# Altium PCB LM2596Adj_pcb.PcbDoc
Units mil, origin at the board's own origin, x right, y up, seen from the top; angles counter-clockwise.
Board outline 2650.03 x 2120.03 mil, 2 copper layers (Top Layer, Bottom Layer); 11 components, 6 nets, 29 pads, 0 vias.
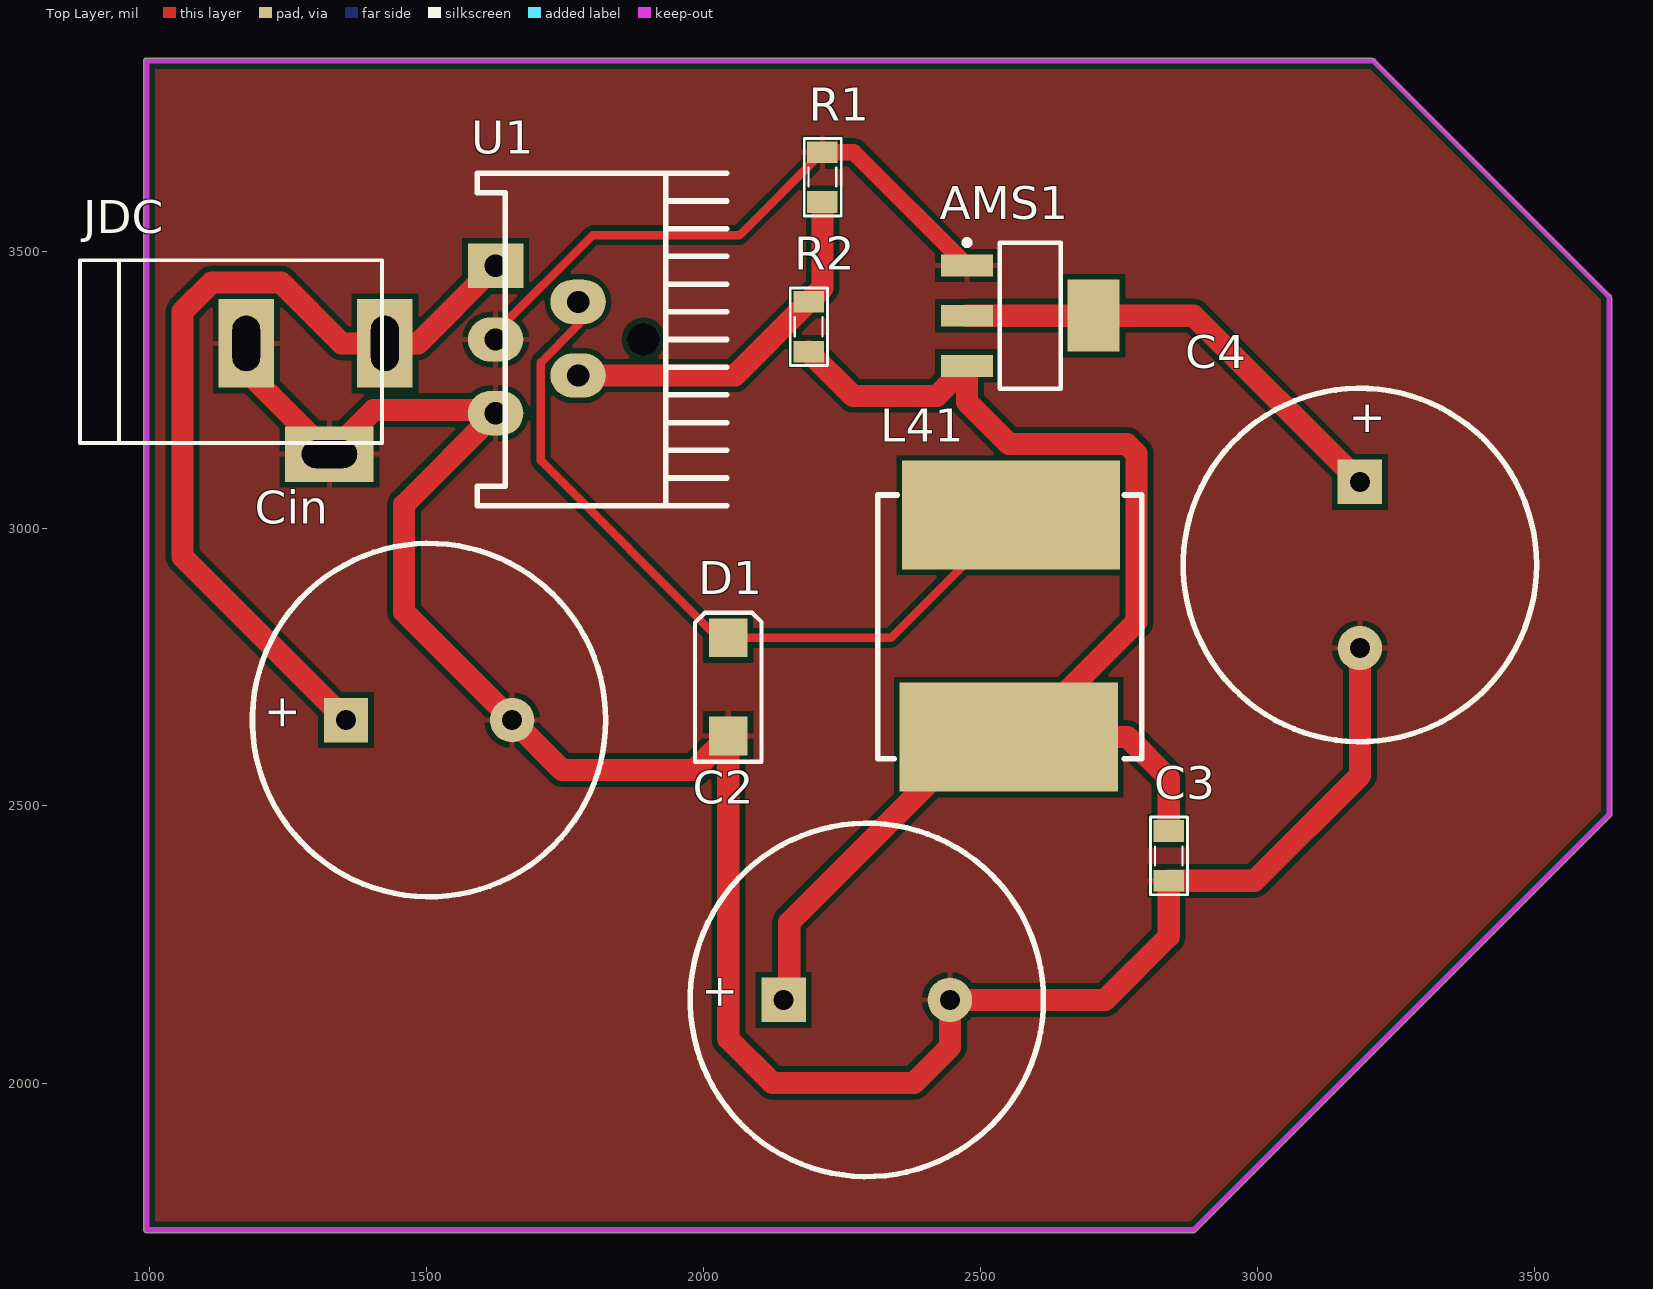
[diagram p0: Top Layer view]
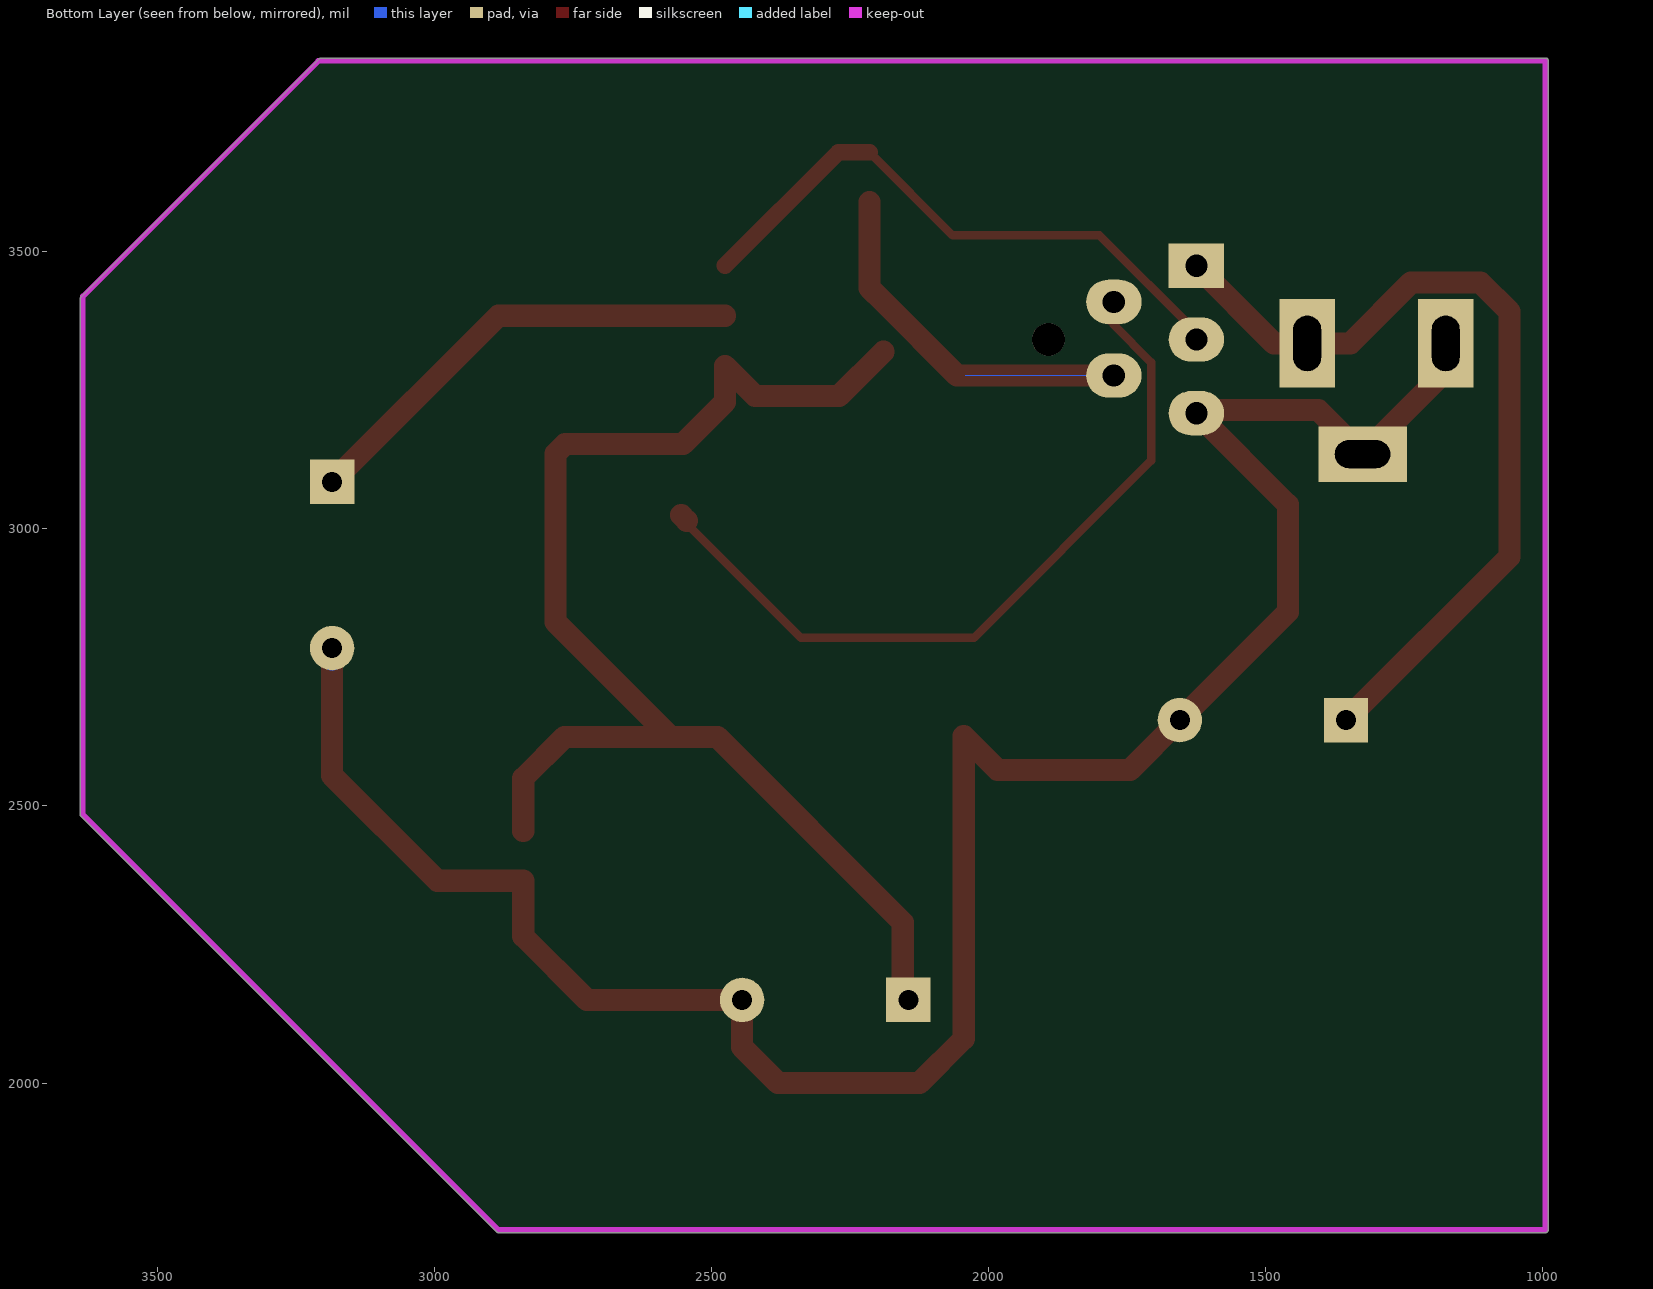
[diagram p1: Bottom Layer view, seen from below]
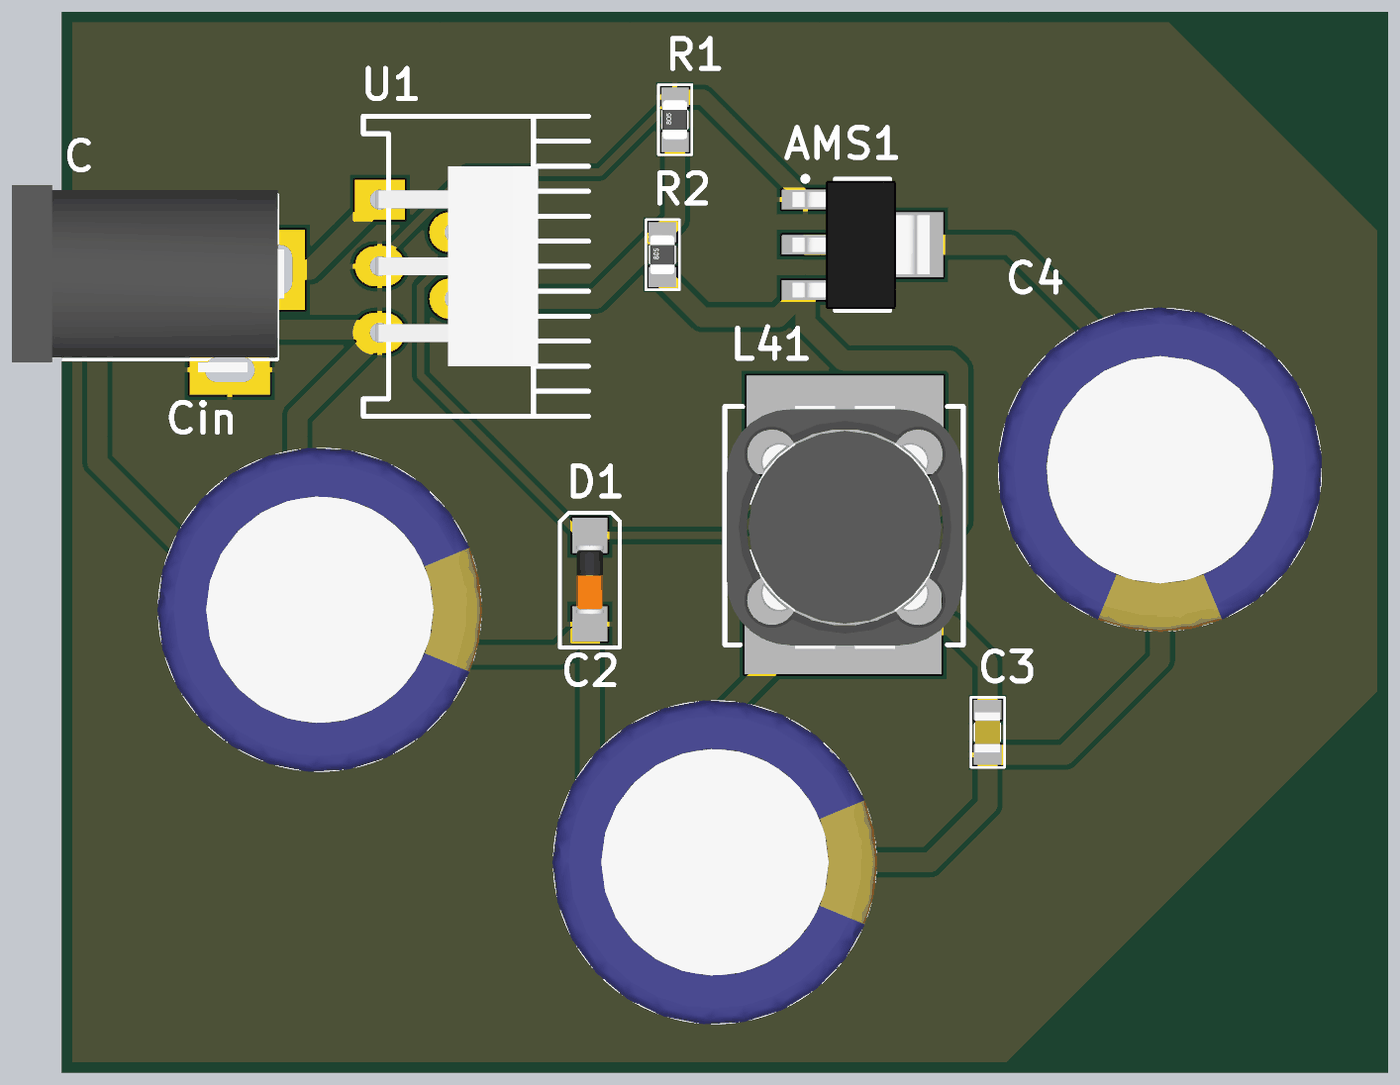
[diagram p2: 3D render of the assembled board from above, using the file's embedded part models]

## Layer stack, top to bottom
Top Solder: solder mask 0.4, Solder Resist, Dk 3.5
Top Layer: signal copper 1.4
Dielectric 1: dielectric 12.6, FR-4, Dk 4.8
Bottom Layer: signal copper 1.4
Bottom Solder: solder mask 0.4, Solder Resist, Dk 3.5

## Board outline
995,1729.98 cw(c995,1735) 989.99,1735 989.99,3845 cw(c995,3845) 995,3850.01 3205,3850.01 cw(c3205,3845) 3208.56,3848.53 3208.55,3848.55 3638.55,3418.55 3638.53,3418.56 cw(c3635,3415) 3640.01,3415 3640.01,2485 cw(c3635,2485) 3638.53,2481.44 3638.55,2481.45 2888.55,1731.45 2888.56,1731.47 cw(c2885,1735) 2885,1729.98

## Design rules (kind name [scope] priority, off if disabled: settings)
Clearance [All] p1: gap=10 ignorepadtopadclearanceinfootprint=TRUE
PolygonConnect [All] p1: connectstyle=Relief reliefconductorwidth=10 reliefentries=4 polygonreliefangle="90 Angle" airgapwidth=10
RoutingVias [All] p1: holewidth=28 width=50 viastyle="Through Hole" minholewidth=28 minwidth=50 maxholewidth=28 maxwidth=50
SolderMaskExpansion [All] p1: expansion=4
Width [All] p1: maxlimit=50 minlimit=15 preferedwidth=30 minimp=50.000000 maximp=50.000000 favimp=50.000000
30 further rules are at their usual default settings.

## Classes and differential pairs
component class "LM2596 Adjustable_AMS1117": AMS1 C2 C3 C4 Cin D1 JDC L41 R1 R2

## Components (designator, comment, footprint, x,y, rotation, side; value= is the part's Value field where it differs from the comment)
AMS1 "AMS1117-3.3V" SOT223 2590,3385 r270 top value="AMS1117-3.3V SOT223"
C2 "470uF-25V" CAP_D16 2145,2150 r0 top value=104
C3 "10uF" CAP_0805 2840,2410 r90 top value=33p
C4 "10uF" CAP_D16 3185,3085 r270 top value=104
Cin "680uF-20V" CAP_D16 1355,2655 r0 top value=104
D1 "Diode Schottky" DIODE_ZENER_SMD 2045,2715 r90 top
JDC "Jac DC" DC-IN 1300,3235 r0 top
L41 "22uH" Inductor_SMD 2315,2585 r0 top value="150 mH"
R1 "1k" RES-SMD-0805 2215,3635 r90 top
R2 "3065" RES_SMD_0805 2190,3365 r90 top
U1 "LM2976" LM2576t 1792.09,3343 r270 top

## Footprints (in the part's own frame and the unit in brackets; to place one, negate y for a bottom-side part, rotate by r counter-clockwise, add the part's x,y. Pads: shape width x height; smd on the part's side, far side on the other; paste and mask are expansions set on the pad)
CAP_0805 [mil]
  rect 39.37x55 smd: 1(-45,0) 2(45,0)
  silkscreen extent -70,-34 70,33, body extent -40,-25 40,25, height 24
CAP_D16 [mil]
  rect 80x80 hole 36: 1(0,0)
  round 80 hole 36: 2(300,0)
  silkscreen extent -169,-319 469,319, body extent -175,-325 475,325, height 866
DC-IN [mil] "Jac DC input"
  rect 100x160 hole 50 slot 100 at 90 deg: 1(125,100) 2(-125,100)
  rect 160x100 hole 50 slot 100 at 0 deg: 3(25,-100)
  silkscreen extent -425,-80 120,250, body extent -410,-105 134,269, height 434
DIODE_ZENER_SMD [mil]
  rect 70x70 smd: 1(-88.58,0) 2(88.58,0)
  silkscreen extent -135,-60 134,60, body extent -69,-29 69,29, height 57
Inductor_SMD [mm]
  rect 10x5 smd: 1(6.096,11.176) 2(6,1)
  silkscreen extent 0,0 12.1,12.1, body extent 0.1,-0.2 12.1,12.14, height 7.15
LM2576t [mil]
  rect 80x100 hole 40: 1(-132,-167.09)
  oval 80x100 hole 40: 2(-67,-18) 3(1,-167) 4(66,-18) 5(134,-167)
  round 59.06 hole 59.06: ""(1,100)
  silkscreen extent -299,-200 301,250, body extent -199,-175 201,150, height 859
RES-SMD-0805 [mil]
  rect 39.37x55 smd: 1(-45,0) 2(45,0)
  silkscreen extent -70,-34 70,33, body extent -39,-25 39,25, height 31
RES_SMD_0805 [mil]
  rect 39.37x55 smd: 1(-45,0) 2(45,0)
  silkscreen extent -70,-34 70,33, body extent -39,-25 39,25, height 31
SOT223 [mm]
  rect 1x2.4 smd: 1(-2.3,-2.9) 2(0,-2.9) 3(2.3,-2.9)
  rect 3.3x2.4 smd: 4(0,2.9)
  silkscreen extent -3.47,-3.02 3.35,1.4, body extent -3.25,-3.56 3.25,3.4, height 1.68

## Part data
AMS1: library part "AMS1117 SMD", "Dán", Chung_Loai=Dán, Don_Vi=Con, Ma_Hang=MH000596
C2 C4 Cin: library part CAP-ALU-DIP, "Capacitor (Semiconductor SIM Model)", LatestRevisionDate=17-Jul-2002, LatestRevisionNote="Re-released for DXP Platform.", PackageReference=C1206, Publisher="Altium Limited"
C3: library part CapSMD, "Capacitor", LatestRevisionDate=17-Jul-2002, LatestRevisionNote="Re-released for DXP Platform.", PackageReference=RAD-0.3, Published=8-Jun-2000, Publisher="Altium Limited"
D1: "Generic Diode Schottky"
JDC: library part DCIN, "Jac DC input"
L41: library part L1, "Inductor"
R1 R2: library part "Resistor - SMD", "Resistor SMD", Manufacturer="Generic Components", Class=Passive, Published=08/06/2000, Publisher="Altium Hobart Technology Centre"
U1: library part LM2596, Max Input Voltage="12 V", Max Output Current="3 (6.0 peak) A", Max Output Voltage=mV, Temperature Range="-40 to +125 degC", Category=IC-Power, Min Input Voltage=mV, Min Output Voltage=mV, Mounting Technology="Surface Mount", Status=Unreleased, Supply Voltage=mV

## Nets (pads, with @x,y where several pads share a name; then routed paths per layer and width w, separated by ;. In a path a pad name is that pad's centre, name@x,y a point inside that pad or via, vN(x,y) a via of type N, cw(c..) or ccw(c..) an arc to the next point about the centre after c; other vN are vias at no path point)
+3.3V: AMS1.2 AMS1.4 C4.1 | length 833.4
  Top Layer w40: AMS1.2 AMS1.4 2885,3385 C4.1
+5: AMS1.3 C2.1 C3.2 L41.2 R2.1 | length 2442.3
  Top Layer w40: C2.1 2155,2160 2155,2290 2489.37,2624.37 L41.2 L41.2@2574.37,2624.37 ; R2.1 2270,3240 2421.38,3240 AMS1.3 2475.83,3229.17 2551.57,3153.43 2764.28,3153.43 2781.85,3135.85 2781.85,2831.85 L41.2@2574.37,2624.37 ; C3.2 2840,2550 2765.63,2624.37 L41.2@2574.37,2624.37
GND: AMS1.1 C2.2 C3.1 C4.2 Cin.2 D1.1 JDC.2 JDC.3 R1.2 U1.3 U1.5 | length 5156.6
  Top Layer w15: U1.3 1625.09,3355.09 1800,3530 2065,3530 R1.2
  Top Layer w30: R1.2 2271.38,3680 AMS1.1
  Top Layer w40: JDC.2 1175,3285 JDC.3 1405,3215 1631.09,3215 U1.5 1460,3043.91 1460,2850 Cin.2 1745,2565 1983.58,2565 D1.1 2045,2080 2125,2000 2380,2000 2445,2065 C2.2 2725,2150 2840,2265 C3.1 2995,2365 3185,2555 C4.2
  Bottom Layer w40: C4.2@3185,2765 C4.2
NetCin_1: Cin.1 JDC.1 U1.1 | length 1549.9
  Top Layer w40: Cin.1 1060,2950 1060,3392.43 1112.57,3445 1237.43,3445 1347.43,3335 JDC.1 1485,3335 U1.1
NetD1_2: D1.2 L41.1 U1.2 | length 1418.4
  Top Layer w15: U1.2@1774.09,3385.99 1774.09,3368.32 1706.59,3300.82 1706.59,3123.41 2026.42,2803.58 D1.2 2338.58,2803.58 2555,3020 L41.1 ; U1.2 U1.2@1784.09,3400
  Top Layer w40: U1.2@1774.09,3385.99 U1.2 ; L41.1@2545,3015 L41.1
NetR1_1: R1.1 R2.2 U1.4 | length 933.5
  Top Layer w40: U1.4@1771.09,3280 U1.4 2057,3277 R2.2 2215,3435 R1.1
  Bottom Layer w0: U1.4 2042,3277
pads on no net: U1.

## Polygon pours and split planes (outlines as drawn)
GND on Top Layer (solid, pour order 2): 995,3845 3210,3845 3635,3420 3635,2485 2885,1735 995,1735

## Keep-outs
Keep-Out Layer:
  lines w10: 995,1735 995,3845 3210,3845 3635,3420 3635,2485 2885,1735 995,1735

## Text inside footprints (layer, text, board x,y; h text height)
C2: Top Overlay "+" at 2075,2130 h100 r90
C4: Top Overlay "+" at 3165,3155 h100
Cin: Top Overlay "+" at 1285,2635 h100 r90